# Altium PCB PCB-NANDs.PcbDoc
Units mm, origin at the board's own origin, x right, y up, seen from the top; angles counter-clockwise.
Board outline 100.08 x 100.08 mm, 2 copper layers (Top Layer, Bottom Layer); 13 components, 18 nets, 92 pads, 12 vias.
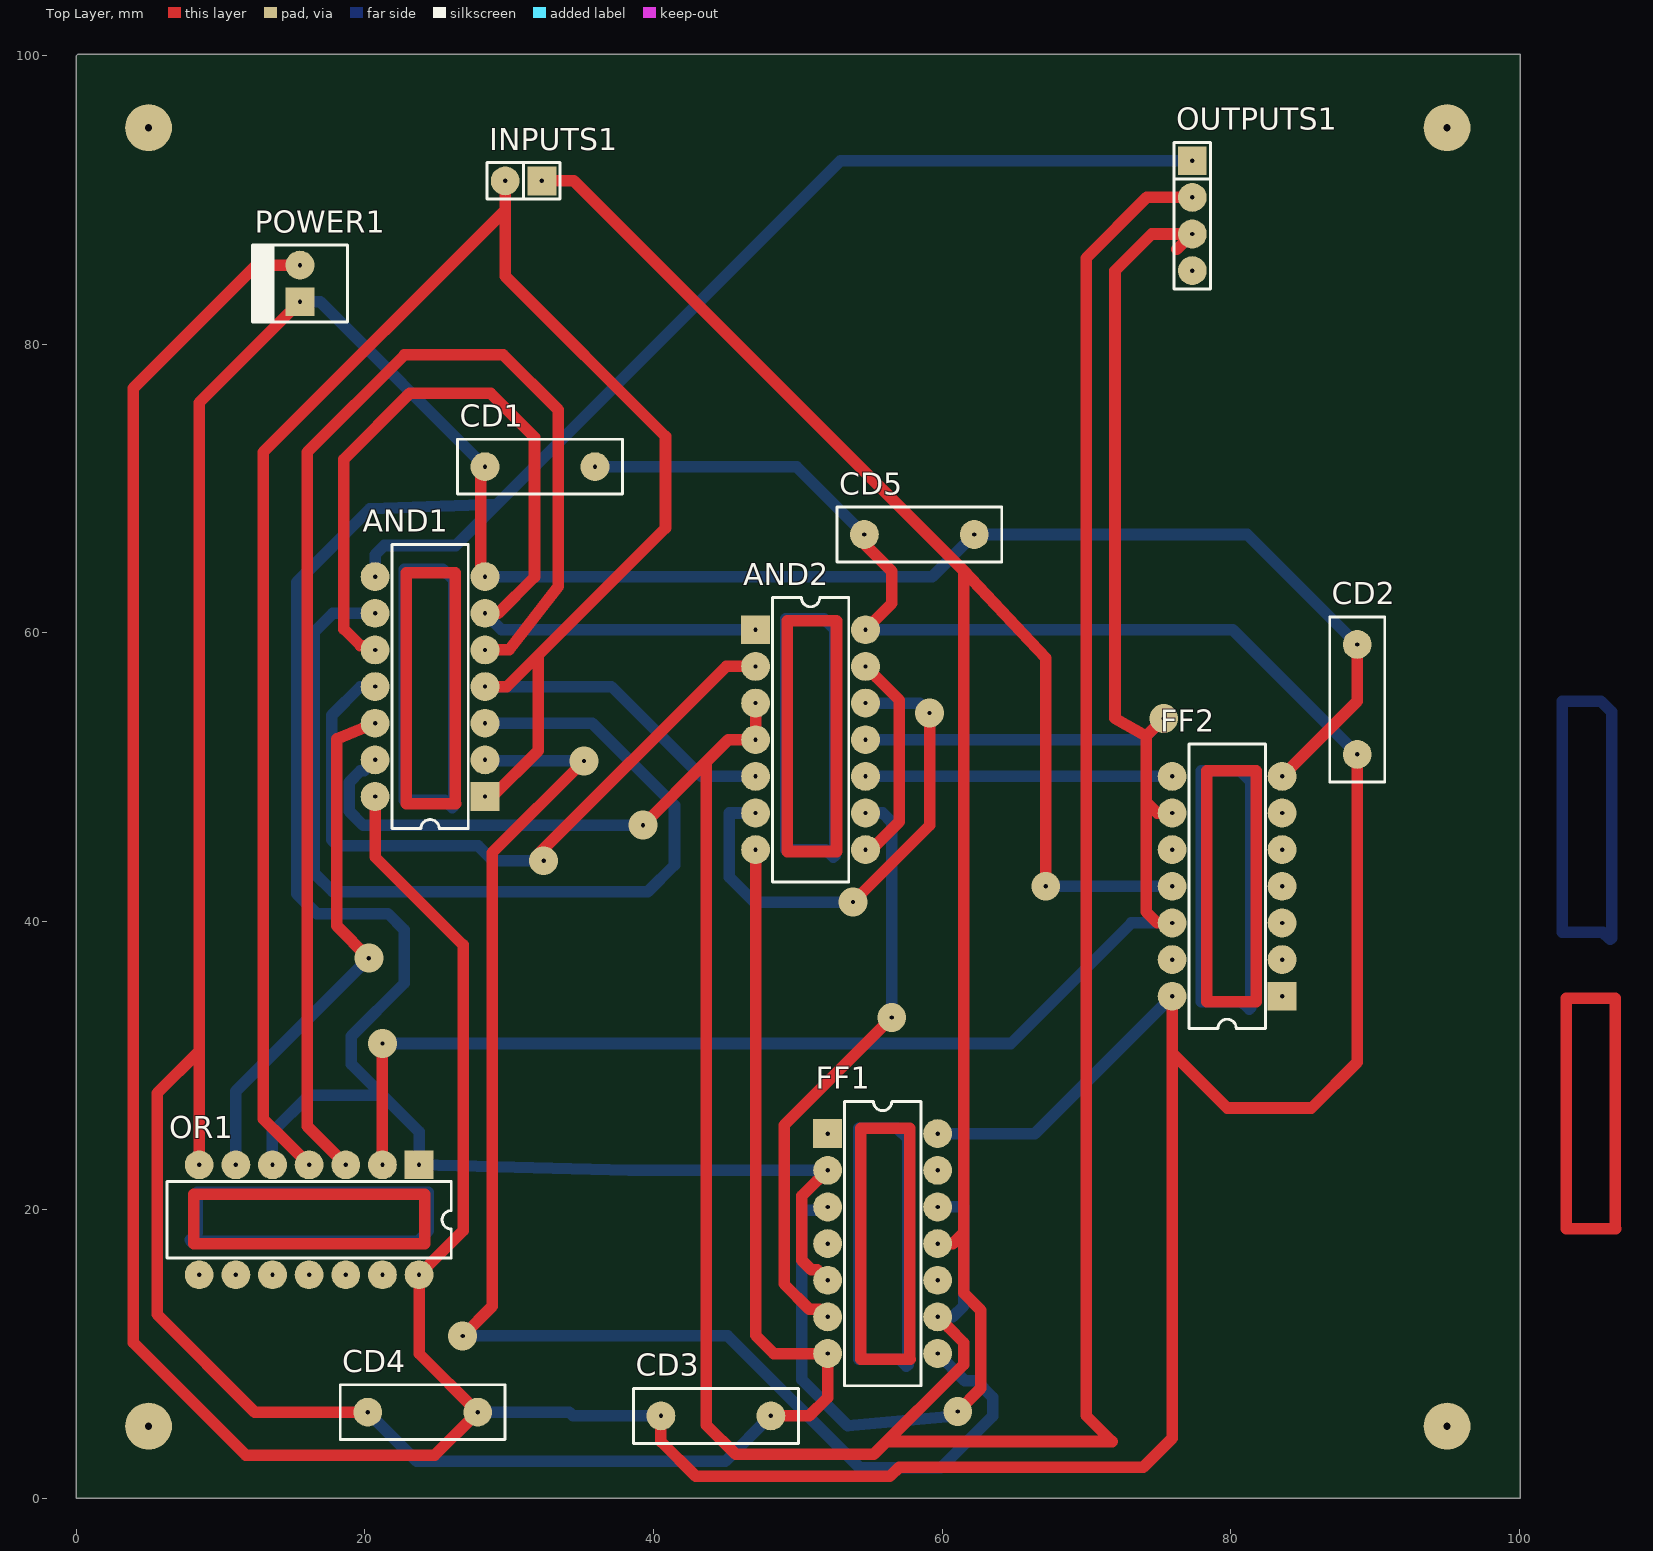
[diagram p0: Top Layer view]
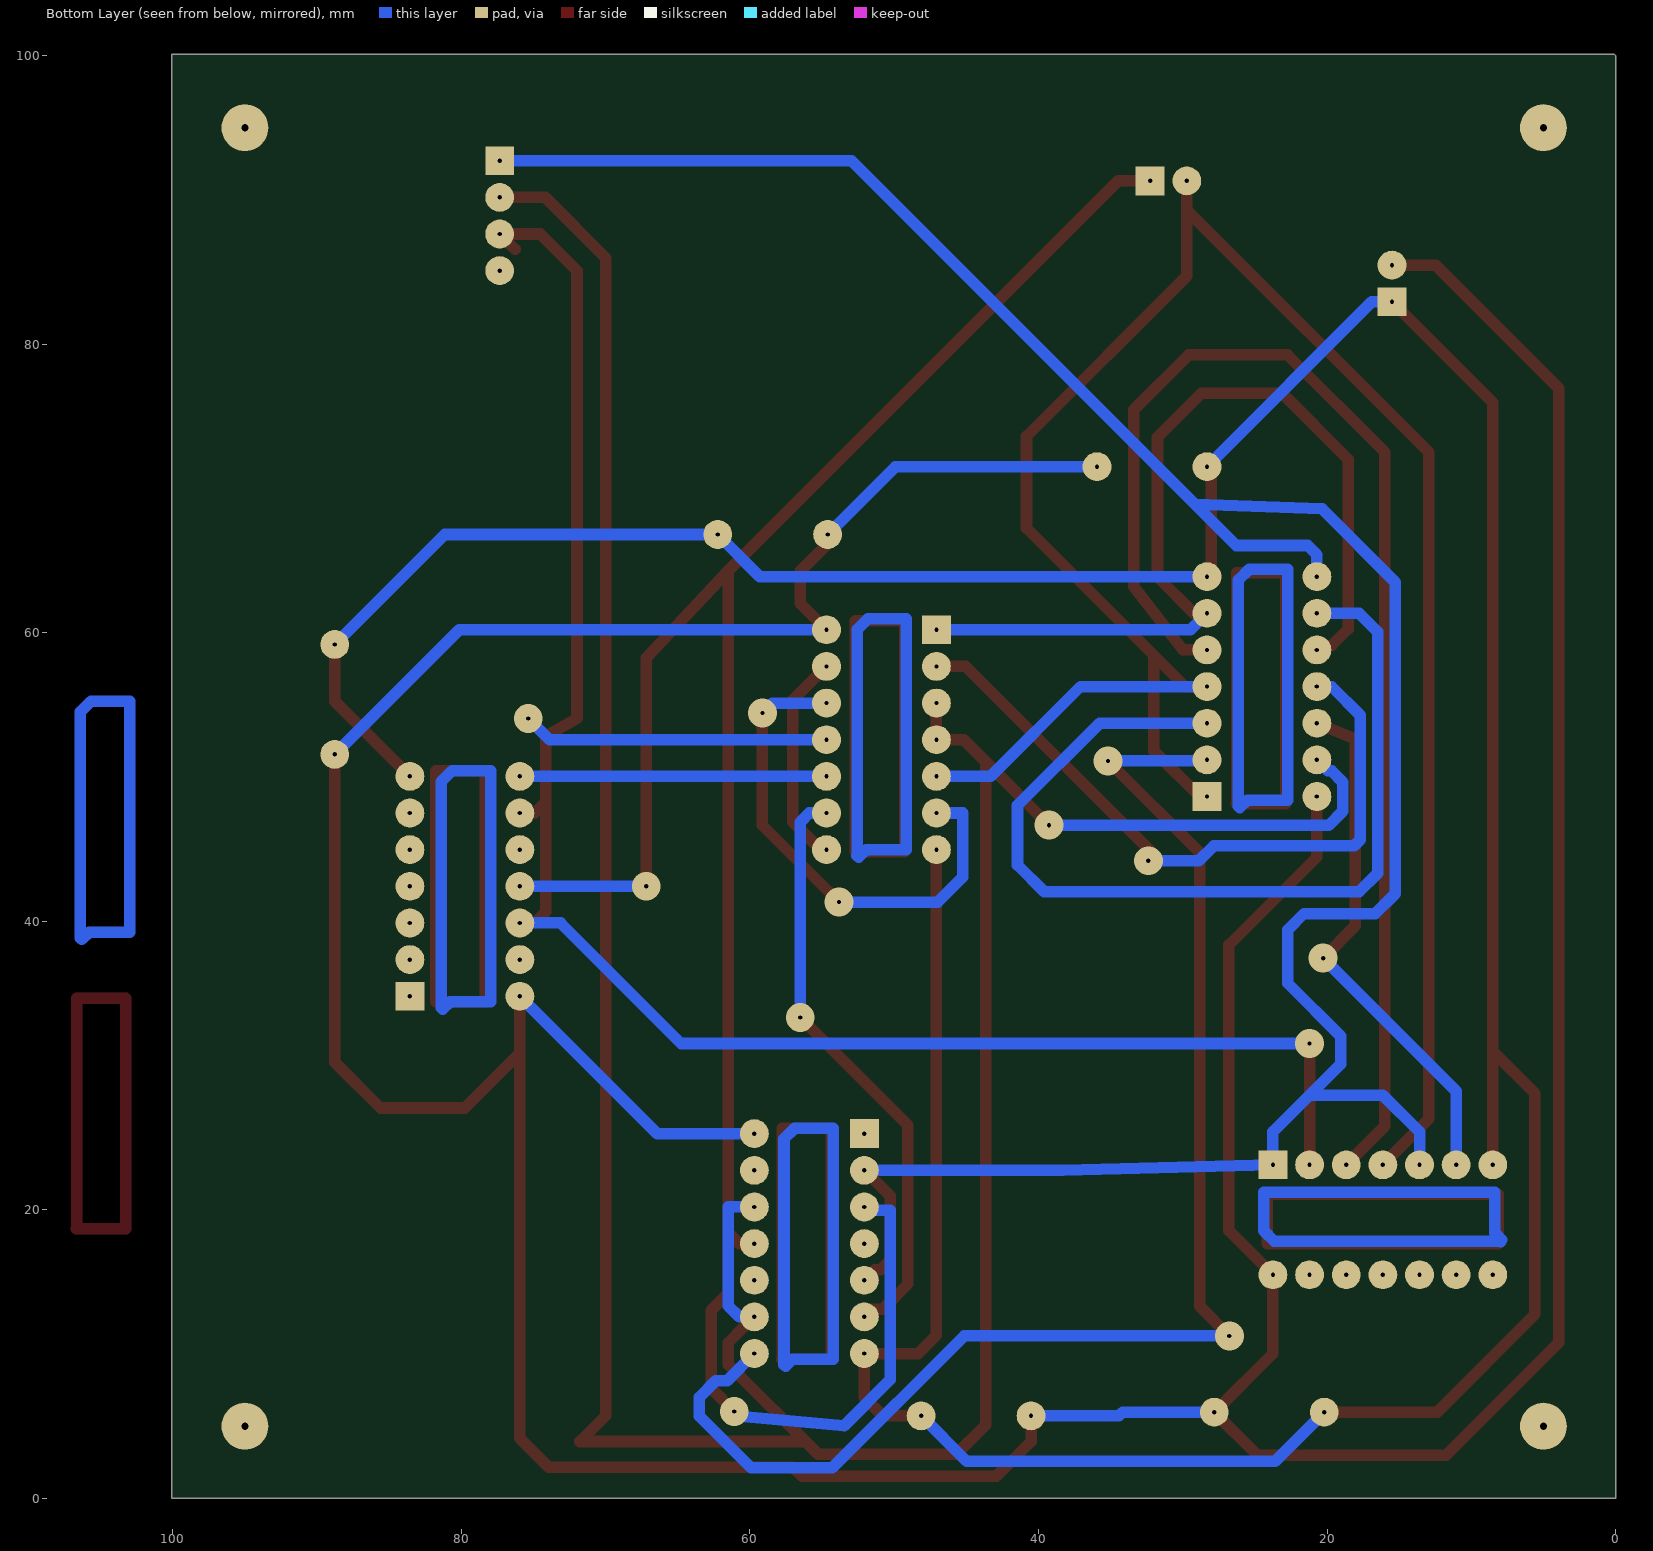
[diagram p1: Bottom Layer view, seen from below]

## Layer stack, top to bottom
Top Solder: solder mask 0.0102, Solder Resist, Dk 3.5
Top Layer: signal copper 0.0356
Dielectric 1: dielectric 0.32, FR-4, Dk 4.8
Bottom Layer: signal copper 0.0356
Bottom Solder: solder mask 0.0102, Solder Resist, Dk 3.5

## Board outline
0,0 100.076,0 100.076,100.076 0.076,100.076 0,100

## Design rules (kind name [scope] priority, off if disabled: settings)
Clearance [All] p1: gap=0.4 ignorepadtopadclearanceinfootprint=FALSE
PolygonConnect [All] p1: connectstyle=Relief reliefconductorwidth=0.254 reliefentries=4 polygonreliefangle="90 Angle" airgapwidth=0.254
RoutingVias [All] p1: holewidth=0.3 width=2 viastyle="Through Hole" minholewidth=0.3 minwidth=1.5 maxholewidth=0.5 maxwidth=2
SolderMaskExpansion [All] p1: expansion=0.102
Width [All] p1: maxlimit=0.9 minlimit=0.6 preferedwidth=0.8
30 further rules are at their usual default settings.

## Classes and differential pairs
component class Esquematico: AND1 CD1 CD2 CD3 CD4 CD5 FF2 INPUTS1 OUTPUTS1 POWER1

## Components (designator, comment, footprint, x,y, rotation, side; value= is the part's Value field where it differs from the comment)
AND1 "SN74HC08N" N014 24.511,56.261 r90 top
AND2 "SN74HC08N" N014 50.883,52.578 r270 top
CD1 "Cap" RAD-0.3 32.131,71.501 r0 top value=100pF
CD2 "Cap" RAD-0.3 88.773,55.372 r270 top value=100pF
CD3 "Cap" RAD-0.3 44.323,5.715 r180 top value=100pF
CD4 "Cap" RAD-0.3 24.003,5.969 r0 top value=100pF
CD5 "Cap" RAD-0.3 58.42,66.802 r180 top value=100pF
FF1 "SN74LS74AN" N014D 55.88,17.653 r270 top
FF2 "SN74LS74AN" N014D 79.756,42.418 r90 top
INPUTS1 "CON2" SIP2 30.988,91.313 r180 top
OR1 "SN74HC32N" N014 16.129,19.304 r180 top
OUTPUTS1 "CON4" SIP4 77.343,88.9 r270 top
POWER1 "MOLEX2" MOLEX2 15.494,82.931 r90 top

## Footprints (in the part's own frame and the unit in brackets; to place one, negate y for a bottom-side part, rotate by r counter-clockwise, add the part's x,y. Pads: shape width x height; smd on the part's side, far side on the other; paste and mask are expansions set on the pad)
MOLEX2 [mm]
  rect 2x2 hole 0.3: 1(0,0)
  round 2 hole 0.3: 2(2.54,0)
  silkscreen extent -1.4,-3.3 3.94,3.3, body extent -1.27,-3.17 3.81,3.18, height 10.74
N014 [mm] "DIP; 14 Leads; Row Spacing 7.62 mm; Pitch 2.54 mm"
  rect 2x2 hole 0.3: 1(-7.62,-3.81)
  round 2 hole 0.3: 2(-5.08,-3.81) 3(-2.54,-3.81) 4(0,-3.81) 5(2.54,-3.81) 6(5.08,-3.81) 7(7.62,-3.81) 8(7.62,3.81) 9(5.08,3.81) 10(2.54,3.81) 11(0,3.81) 12(-2.54,3.81) 13(-5.08,3.81) 14(-7.62,3.81)
  silkscreen extent -9.85,-2.65 9.85,2.65
N014D [mm] "DIP; 14 Leads; Row Spacing 7.62 mm; Pitch 2.54 mm"
  rect 2x2 hole 0.3: 1(-7.62,-3.81)
  round 2 hole 0.3: 2(-5.08,-3.81) 3(-2.54,-3.81) 4(0,-3.81) 5(2.54,-3.81) 6(5.08,-3.81) 7(7.62,-3.81) 8(7.62,3.81) 9(5.08,3.81) 10(2.54,3.81) 11(0,3.81) 12(-2.54,3.81) 13(-5.08,3.81) 14(-7.62,3.81)
  silkscreen extent -9.85,-2.65 9.85,2.65
RAD-0.3 [mm] "Radial Cap, Thru-Hole; 2 Leads; 0.3 in Pin Spacing"
  round 2 hole 0.3: 1(-3.81,0) 2(3.81,0)
  silkscreen extent -5.71,-1.91 5.71,1.91
SIP2 [mm]
  rect 2x2 hole 0.3: 1(-1.27,0)
  round 2 hole 0.3: 2(1.27,0)
  silkscreen extent -2.54,-1.27 2.54,1.27
SIP4 [mm]
  rect 2x2 hole 0.3: 1(-3.81,0)
  round 2 hole 0.3: 2(-1.27,0) 3(1.27,0) 4(3.81,0)
  silkscreen extent -5.08,-1.27 5.08,1.27, body extent -5.08,-1.27 5.08,1.27, height 8.38

## Part data
AND1 AND2: "Quadruple 2-Input Positive-AND Gate", ComponentLink1Description="Manufacturer Link", ComponentLink1URL=http://www.ti.com/, ComponentLink2Description=Datasheet, ComponentLink2URL=http://www-s.ti.com/sc/ds/SN74HC08.pdf, DatasheetVersion=May-1997, LatestRevisionDate=04-Mar-2005, LatestRevisionNote="Stylized 3D Model Added.", PackageDescription="DIP; 14 Leads; Row Spacing 7.62 mm; Pitch 2.54 mm", PackageReference=N014, PackageVersion=Oct-1995, Published=8-Jun-2000, Publisher="Altium Limited"
CD1 CD2 CD3 CD4 CD5: "Capacitor", LatestRevisionDate=17-Jul-2002, LatestRevisionNote="Re-released for DXP Platform.", PackageDescription="Radial Cap, Thru-Hole; 2 Leads; 0.3 in Pin Spacing", PackageReference=RAD-0.3, Published=8-Jun-2000, Publisher="Altium Limited"
FF1 FF2: "Dual D-Type Positive-Edge-Triggered Flip-Flop with Preset and Clear", ComponentLink1Description="Manufacturer Link", ComponentLink1URL=http://www.ti.com/, ComponentLink2Description=Datasheet, ComponentLink2URL=http://www-s.ti.com/sc/ds/sn74ls74a.pdf, DatasheetVersion=Mar-1988, LatestRevisionDate=04-Mar-2005, LatestRevisionNote="Stylized 3D Model Added.", PackageDescription="DIP; 14 Leads; Row Spacing 7.62 mm; Pitch 2.54 mm", PackageReference=N014D, PackageVersion=Oct-1995, Published=8-Jun-2000, Publisher="Altium Limited"
OR1: "Quadruple 2-Input Positive-OR Gate", ComponentLink1Description="Manufacturer Link", ComponentLink1URL=http://www.ti.com/, ComponentLink2Description=Datasheet, ComponentLink2URL=http://www-s.ti.com/sc/ds/sn74hc32.pdf, DatasheetVersion=May-1997, LatestRevisionDate=04-Mar-2005, LatestRevisionNote="Stylized 3D Model Added.", PackageDescription="DIP; 14 Leads; Row Spacing 7.62 mm; Pitch 2.54 mm", PackageReference=N014, PackageVersion=Oct-1995, Published=8-Jun-2000, Publisher="Altium Limited"

## Free pads (board coordinates)
  round 3.25 hole 0.5: 3(5,5) 4(95,5) 5(95,95) 6(5,95)

## Via types
v1: diameter 2, hole 0.3, Top Layer to Bottom Layer, 12 vias

## Nets (pads, with @x,y where several pads share a name; then routed paths per layer and width w, separated by ;. In a path a pad name is that pad's centre, name@x,y a point inside that pad or via, vN(x,y) a via of type N, cw(c..) or ccw(c..) an arc to the next point about the centre after c; other vN are vias at no path point)
Clock: FF1.3 FF1.11 FF2.11 INPUTS1.1 | length 161
  Top Layer w0.8: INPUTS1.1 34.468,91.313 61.493,64.287 ; FF1.11 60.731,17.653 61.493,18.415 ; v1(61.087,6.017) 62.69,7.62 62.69,13.033 61.493,14.23 61.493,18.415 ; v1(67.183,42.418) 67.183,58.242 61.493,64.287 ; 61.493,18.415 61.493,64.287
  Bottom Layer w0.8: FF1.3 51.841,19.964 50.267,19.964 50.267,8.23 53.467,5.029 61.087,5.715 v1(61.087,6.017) ; v1(67.183,42.418) FF2.11
GND: AND1.7 AND2.7 CD1.1 CD2.1 CD3.1 CD4.1 CD5.1 FF1.7 FF2.7 OR1.7 POWER1.1 | length 278.5
  Top Layer w0.8: OR1.7 8.509,30.988 ; POWER1.1 8.509,75.946 8.509,30.988 ; CD4.1 12.37,5.969 5.588,12.751 5.588,28.067 8.509,30.988 ; AND1.7 28.023,64.179 28.023,71.203 CD1.1 ; AND2.7 47.073,11.297 48.336,10.033 FF1.7 52.07,6.985 50.8,5.715 CD3.1 ; FF2.7 88.773,55.245 CD2.1
  Bottom Layer w0.8: POWER1.1 16.891,82.931 CD1.1 ; CD4.1 23.597,2.565 44.983,2.565 CD3.1 ; AND1.7 59.309,63.881 CD5.1 81.153,66.802 CD2.1
R1: AND1.3 AND1.9 | length 67.4
  Bottom Layer w0.8: AND1.9 17.78,61.341 16.485,60.046 16.485,43.332 17.78,42.037 39.599,42.037 41.453,43.891 41.453,48.031 35.763,53.721 AND1.3
R2: AND1.6 AND1.10 AND2.1 | length 64.4
  Top Layer w0.8: AND1.10 20.701,59.106 19.685,59.106 18.542,60.249 18.542,72.009 23.114,76.581 28.702,76.581 31.75,73.533 31.75,63.856 29.235,61.341 AND1.6
  Bottom Layer w0.8: AND1.6 29.464,60.198 AND2.1
R3: AND1.5 OR1.3 | length 91.7
  Top Layer w0.8: OR1.3 18.669,23.12 16.875,24.914 16.869,24.914 16.002,25.781 16.002,72.517 22.733,79.248 29.591,79.248 33.401,75.438 33.401,63.198 29.989,58.801 AND1.5
R4: AND1.12 OR1.6 | length 37.1
  Top Layer w0.8: v1(20.27,37.44) 18.034,39.675 18.034,52.627 AND1.12
  Bottom Layer w0.8: OR1.6 11.049,28.219 v1(20.27,37.44)
R5: AND1.11 AND2.2 | length 48.8
  Top Layer w0.8: v1(32.385,44.192) 31.975,44.602 45.03,57.658 AND2.2
  Bottom Layer w0.8: AND1.11 19.685,56.261 17.701,54.277 17.701,45.641 18.105,45.237 27.838,45.237 28.884,44.192 v1(32.385,44.192)
R6: AND2.6 AND2.12 | length 35.6
  Top Layer w0.8: v1(53.823,41.326) 59.131,46.634 v1(59.131,54.432)
  Bottom Layer w0.8: AND2.6 45.263,47.498 45.263,43.053 46.99,41.326 v1(53.823,41.326) ; AND2.12 58.445,55.118 v1(59.131,54.432)
R7: AND2.8 AND2.13 | length 14.9
  Top Layer w0.8: AND2.8 55.093,44.958 57.023,46.888 57.023,55.328 56.493,55.858 56.493,55.864 55.438,56.918 55.433,56.918 AND2.13
VCC: AND1.14 AND2.14 CD1.2 CD2.2 CD3.2 CD4.2 CD5.2 FF1.14 FF2.14 OR1.14 POWER1.2 | length 364.1
  Top Layer w0.8: POWER1.2 12.471,85.471 3.937,76.937 3.937,10.795 11.735,2.997 24.841,2.997 CD4.2 23.749,10.033 OR1.14 26.797,18.542 26.797,38.354 20.701,44.45 AND1.14 ; CD3.2 40.513,3.937 42.926,1.524 56.388,1.524 57.023,2.159 73.939,2.159 75.946,4.166 FF2.14 ; CD5.2 54.61,66.167 56.515,64.262 56.515,62.02 AND2.14 ; 75.946,30.861 79.756,27.051 85.598,27.051 88.773,30.226 CD2.2
  Bottom Layer w0.8: CD4.2 34.163,5.969 34.417,5.715 CD3.2 ; CD1.2 49.911,71.501 CD5.2 ; AND2.14 80.137,60.198 CD2.2 ; FF1.14 66.421,25.273 FF2.14
W: AND1.1 AND1.4 AND2.5 INPUTS1.2 OR1.4 | length 155
  Top Layer w0.8: OR1.4 16.129,23.12 14.335,24.914 14.329,24.914 12.954,26.289 12.954,72.517 29.718,89.281 INPUTS1.2 29.718,84.709 40.831,73.596 40.831,67.25 29.841,56.261 AND1.4 ; AND1.1 28.829,48.641 32.004,51.816 32.004,58.293
  Bottom Layer w0.8: AND1.4 37.084,56.261 43.307,50.038 AND2.5
y1: AND1.8 FF1.2 FF1.5 OR1.1 OR1.5 OUTPUTS1.1 | length 183.9
  Top Layer w0.8: FF1.5 51.333,15.85 50.927,15.85 50.267,16.51 50.267,20.955 51.308,21.996 51.333,21.996 FF1.2
  Bottom Layer w0.8: OR1.5 13.589,25.4 16.129,27.94 21.209,27.94 ; AND1.8 20.701,65.405 21.336,66.04 26.289,66.04 29.134,68.885 ; FF1.2 38.303,22.733 OR1.1 23.749,25.4 21.209,27.94 ; OUTPUTS1.1 52.959,92.71 29.134,68.885 ; 21.209,27.94 19.05,30.099 19.05,32.029 22.708,35.687 22.708,39.41 21.59,40.528 16.648,40.528 15.265,41.91 15.265,63.5 20.345,68.58 29.134,68.885
y1neg: AND2.9 FF1.6 | length 41.2
  Top Layer w0.8: FF1.6 51.537,13.106 50.8,13.106 49.047,14.859 49.047,25.857 v1(56.515,33.325)
  Bottom Layer w0.8: AND2.9 55.88,47.498 56.515,46.863 v1(56.515,33.325)
Y2: AND1.13 AND2.3 AND2.4 FF1.9 FF1.12 OUTPUTS1.2 | length 227.5
  Top Layer w0.8: v1(39.268,46.66) 43.663,51.054 ; AND2.3 AND2.4 45.187,52.578 43.663,51.054 ; 56.261,3.937 71.78,3.937 69.977,5.74 69.977,85.954 74.193,90.17 OUTPUTS1.2 ; FF1.9 60.474,11.811 61.49,10.795 61.49,9.264 55.274,3.048 45.695,3.048 43.663,5.08 43.663,51.054
  Bottom Layer w0.8: AND1.13 19.939,50.419 19.685,50.419 18.901,49.635 18.901,47.625 19.866,46.66 v1(39.268,46.66) ; FF1.9 60.731,12.573 61.493,13.335 61.493,20.193 FF1.12
y2neg: AND1.2 FF1.8 | length 98.6
  Top Layer w0.8: v1(26.772,11.252) 28.829,13.31 28.829,44.755 v1(35.179,51.105)
  Bottom Layer w0.8: v1(26.772,11.252) 45.141,11.252 54.285,2.108 59.919,2.108 63.5,5.69 63.5,7.01 62.357,8.153 61.57,8.153 FF1.8 ; AND1.2 28.397,51.105 v1(35.179,51.105)
y3: AND2.11 FF2.9 FF2.12 OR1.2 OUTPUTS1.3 | length 147.5
  Top Layer w0.8: OR1.2 v1(21.209,31.521) ; v1(75.362,54.051) 74.143,52.832 ; FF2.12 74.905,39.878 74.143,40.64 74.143,48.26 ; FF2.9 74.905,47.498 74.143,48.26 ; 76.276,86.563 OUTPUTS1.3 74.524,87.63 71.984,85.09 71.984,54.051 74.143,52.832 ; 74.143,48.26 74.143,52.832
  Bottom Layer w0.8: v1(21.209,31.521) 64.77,31.521 73.127,39.878 FF2.12 ; AND2.11 73.889,52.578 v1(75.362,54.051)
y3neg: AND2.10 FF2.8 | length 21.3
  Bottom Layer w0.8: AND2.10 FF2.8
Z: OUTPUTS1.4
pads on no net: FF1.1 FF1.4 FF1.10 FF1.13 FF2.1 FF2.2 FF2.3 FF2.4 FF2.5 FF2.6 FF2.10 FF2.13 OR1.8 OR1.9 OR1.10 OR1.11 OR1.12 OR1.13
copper on no net: | length 465.9
  Top Layer w0.8: 24.031,21.06 22.457,21.06 8.128,21.06 8.128,17.653 24.13,17.653 24.13,21.082 ; 26.267,48.232 26.267,49.806 26.267,64.135 22.86,64.135 22.86,48.133 26.289,48.133 ; 52.683,44.93 52.683,46.504 52.683,60.833 49.276,60.833 49.276,44.831 52.705,44.831 ; 57.763,9.751 57.763,11.325 57.763,25.654 54.356,25.654 54.356,9.652 57.785,9.652 ; 81.766,34.516 81.766,36.09 81.766,50.419 78.359,50.419 78.359,34.417 81.788,34.417 ; 106.658,18.768 106.658,20.342 106.658,34.671 103.251,34.671 103.251,18.669 106.68,18.669
  Bottom Layer w0.8: 7.874,17.907 8.382,18.415 8.382,21.209 24.384,21.209 24.384,18.542 23.644,17.802 7.995,17.802 7.973,17.78 ; 26.035,47.879 25.527,48.387 22.733,48.387 22.733,64.389 25.4,64.389 26.14,63.649 26.14,48 26.162,47.978 ; 52.451,44.45 51.943,44.958 49.149,44.958 49.149,60.96 51.816,60.96 52.556,60.22 52.556,44.571 52.578,44.549 ; 57.531,9.144 57.023,9.652 54.229,9.652 54.229,25.654 56.896,25.654 57.636,24.914 57.636,9.265 57.658,9.243 ; 81.28,33.909 80.772,34.417 77.978,34.417 77.978,50.419 80.645,50.419 81.385,49.679 81.385,34.03 81.407,34.008 ; 106.299,38.735 105.791,39.243 102.997,39.243 102.997,55.245 105.664,55.245 106.404,54.505 106.404,38.856 106.426,38.834